# Altium PCB Antenna_21x18_RevA.PcbDoc
Units mil, origin at the board's own origin, x right, y up, seen from the top; angles counter-clockwise.
Board outline 21000 x 18000 mil, 2 copper layers (Top Layer, Bottom Layer), stack 12.8 mil thick; 5 components, 5 nets, 58 pads, 54 vias.
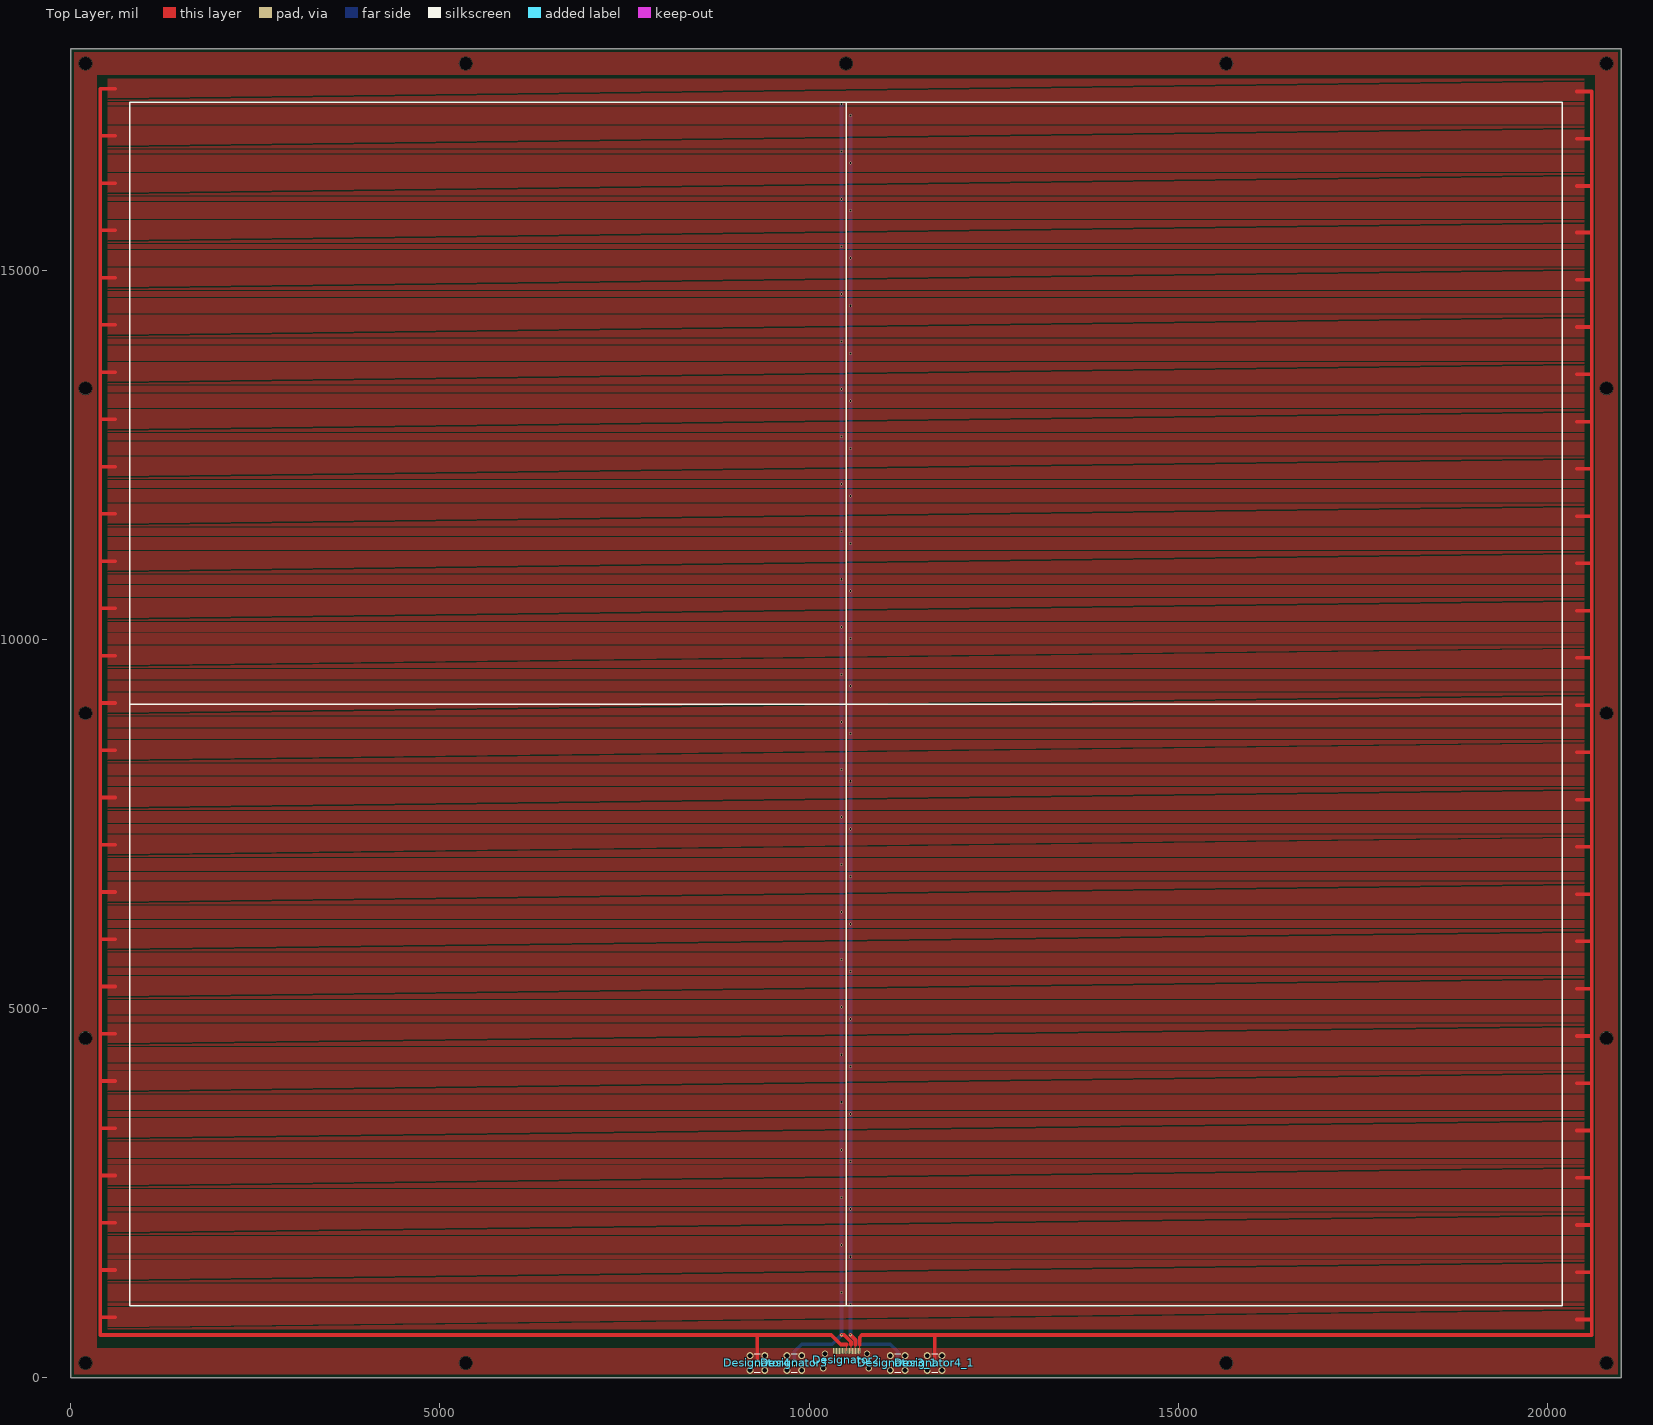
[diagram p0: Top Layer view]
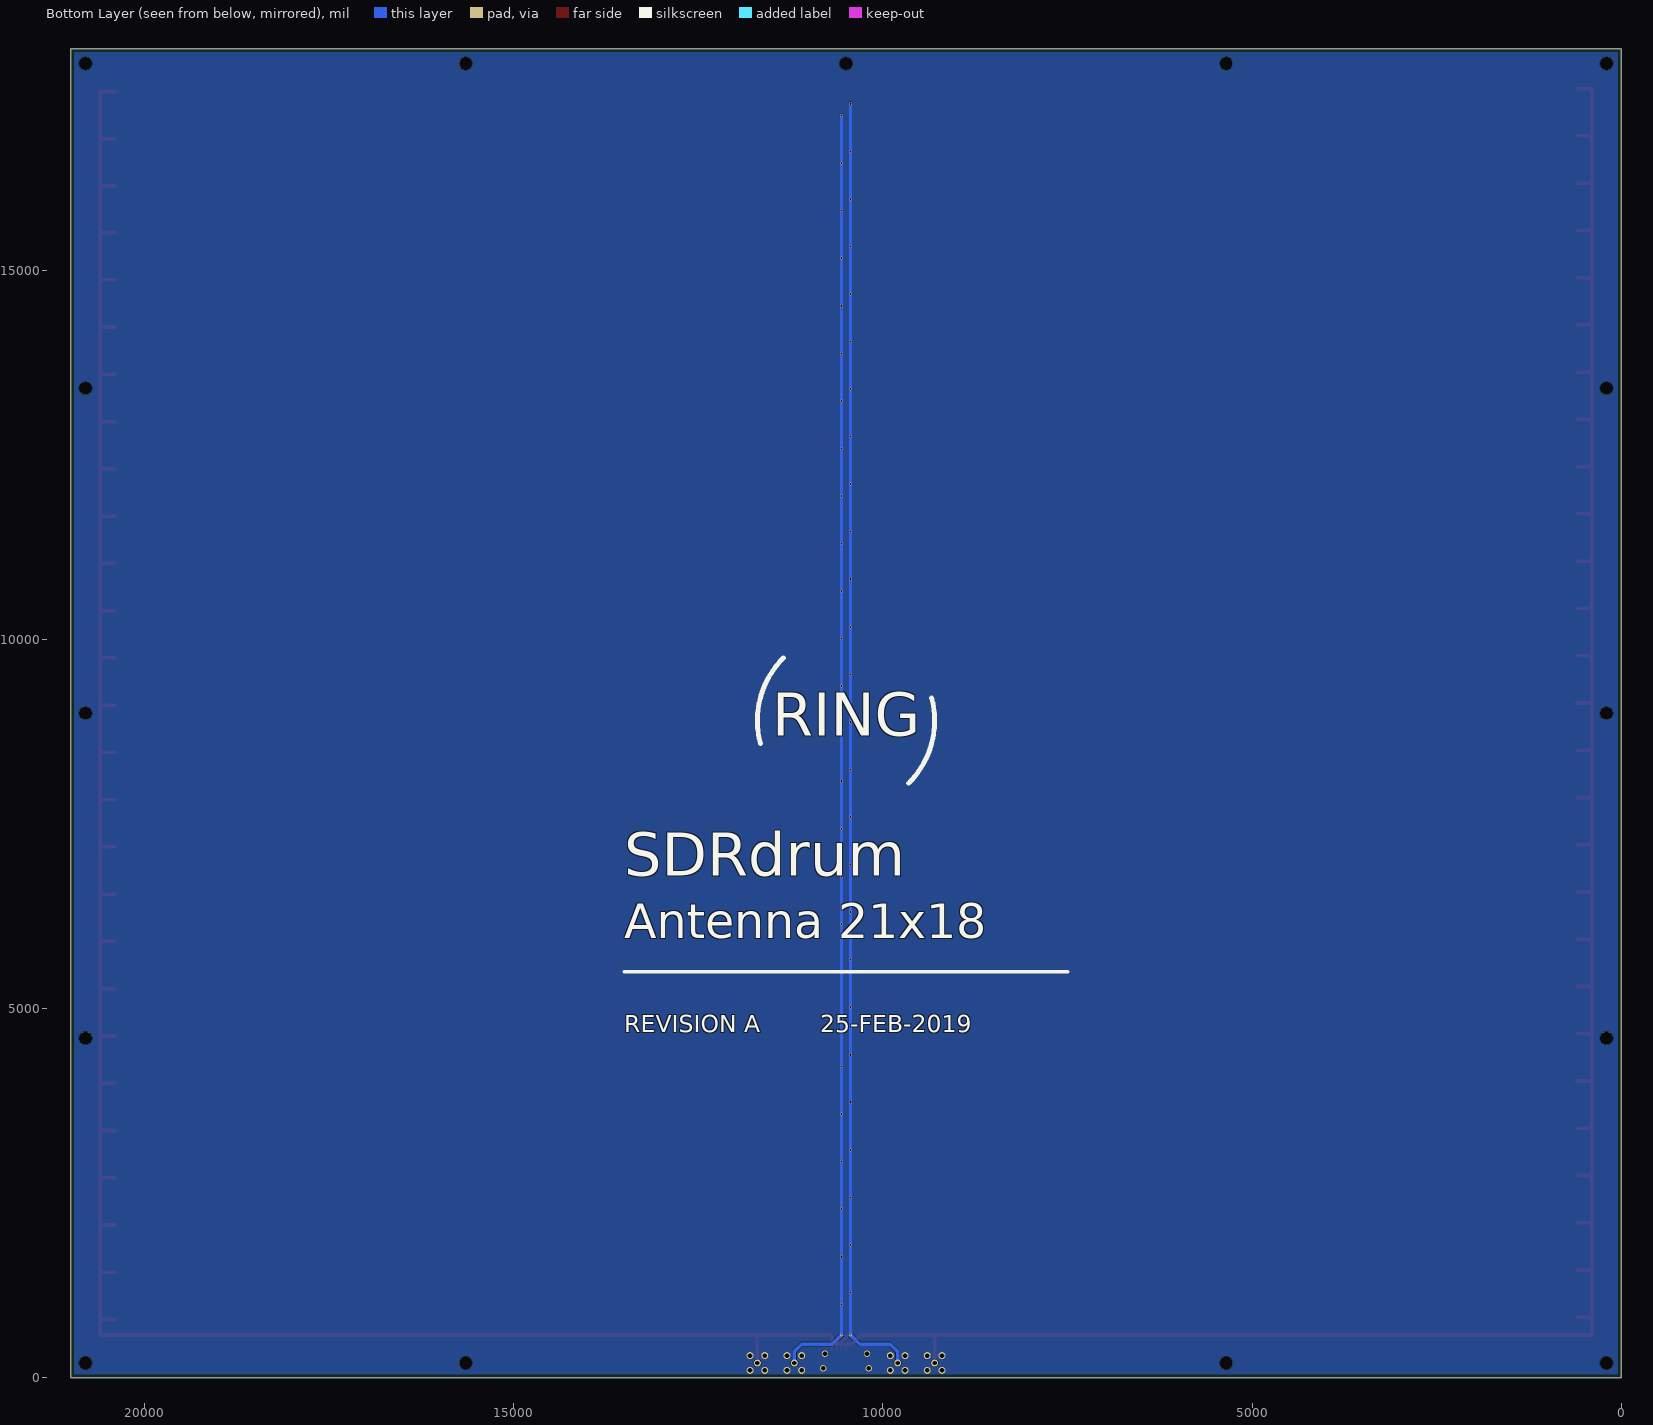
[diagram p1: Bottom Layer view, seen from below]
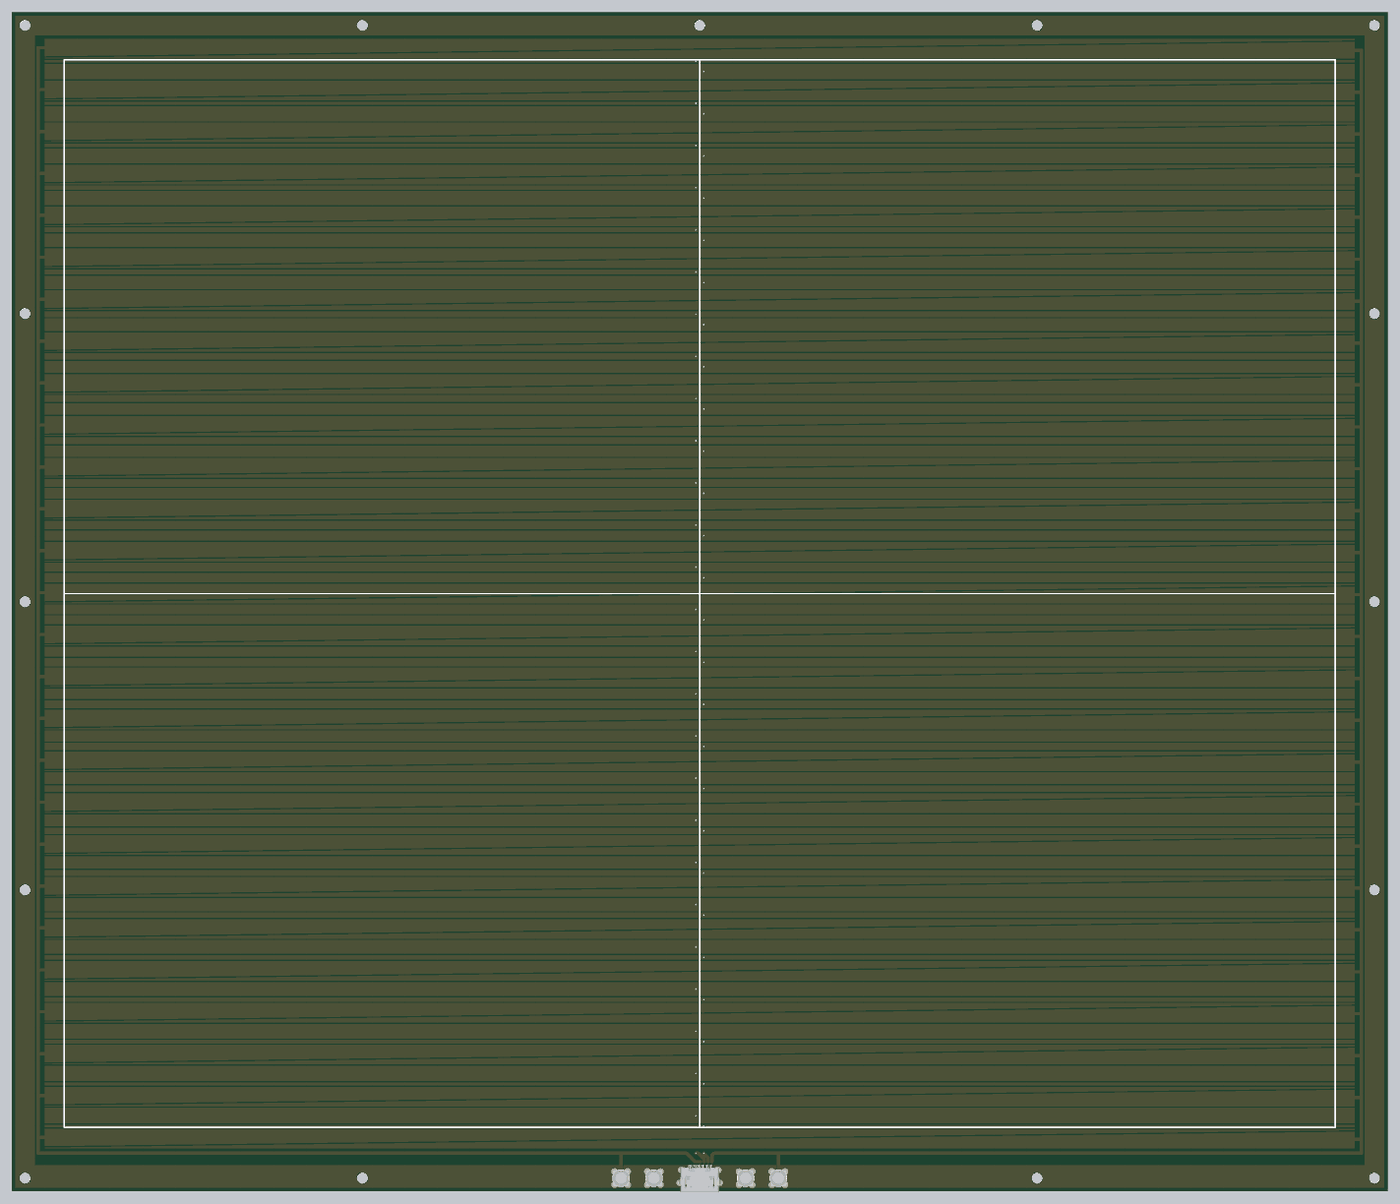
[diagram p2: 3D render of the assembled board from above, using the file's embedded part models]

## Layer stack, top to bottom
Top Solder 1: solder mask 0.4, Solder Resist, Dk 3.5
Top Layer: signal copper 1.4
Dielectric 1: core 10, FR-4, Dk 4.2
Bottom Layer: signal copper 1.4
Bottom Solder 1: solder mask 0.4, Solder Resist, Dk 3.5

## Board outline
0,0 21000,0 21000,18000 0,18000

## Design rules (kind name [scope] priority, off if disabled: settings)
Clearance [All] p1: gap=6 ignorepadtopadclearanceinfootprint=FALSE
HoleSize [All] p1: absolutevalues=TRUE maxlimit=200 minlimit=1 maxpercent=80.000 minpercent=20.000
PlaneConnect [All] p1: planeconnectstyle=Direct reliefexpansion=20 reliefentries=4 reliefconductorwidth=10 reliefairgap=10
PolygonConnect [All] p1: connectstyle=Direct reliefconductorwidth=10 reliefentries=4 polygonreliefangle="90 Angle" airgapwidth=10
RoutingVias [All] p1: holewidth=28 width=50 viastyle="Through Hole" minholewidth=28 minwidth=40 maxholewidth=28 maxwidth=50
SolderMaskExpansion [All] p1: expansion=4
Width [All] p1: maxlimit=100 minlimit=10 preferedwidth=10
28 further rules are at their usual default settings.

## Components (designator, comment, footprint, x,y, rotation, side; value= is the part's Value field where it differs from the comment)
Designator2 "Comment" 10029449-111RLF 10500,325 r0 top
Designator3 "Comment" 5-1814832-1 9800,200 r0 top
Designator3_1 "Comment" 5-1814832-1 11200,200 r180 top
Designator4 "Comment" 5-1814832-1 9300,200 r0 top
Designator4_1 "Comment" 5-1814832-1 11700,200 r180 top

## Footprints (in the part's own frame and the unit in brackets; to place one, negate y for a bottom-side part, rotate by r counter-clockwise, add the part's x,y. Pads: shape width x height; smd on the part's side, far side on the other; paste and mask are expansions set on the pad)
5-1814832-1 [mm]
  round 2.4 hole 1.5: 1(0,0)
  round 2.4 hole 1.6: MH(-2.54,-2.54) MH(-2.54,2.54) MH(2.54,-2.54) MH(2.54,2.54)
  silkscreen extent -3.2,-3.2 3.2,3.2, body extent -3.2,-3.2 3.2,3.2, height 9.5
10029449-111RLF [mm]
  oval 0.3x2 smd: 1(4.75,1) 2(4.25,1) 3(3.75,1) 4(3.25,1) 5(2.75,1) 6(2.25,1) 7(1.75,1) 8(1.25,1) 9(0.75,1) 10(0.25,1) 11(-0.25,1) 12(-0.75,1) 13(-1.25,1) 14(-1.75,1) 15(-2.25,1) 16(-2.75,1) 17(-3.25,1) 18(-3.75,1) 19(-4.25,1)
  round 2.2 hole 1.6: MH1(7.25,0) MH2(7.85,-5) MH3(-7.25,0) MH4(-7.85,-5)
  silkscreen extent -7.5,-3.5 7.5,-1.5, body extent -8.1,-8.45 8.1,1.65, height 6.28

## Free pads (board coordinates)
  round 170 hole 170 unplated: 2(200,200) 2(200,4600) 2(200,9000) 2(200,13400) 2(200,17800) 2(5350,200) 2(5350,17800) 2(10500,17800) 2(15650,200) 2(15650,17800) 2(20800,200) 2(20800,4600) 2(20800,9000) 2(20800,13400) 2(20800,17800)

## Via types
v1: diameter 40, hole 28, Top Layer to Bottom Layer, tented both sides, 52 vias
v2: diameter 40, hole 20, Top Layer to Bottom Layer, tented both sides, 2 vias

## Nets (pads, with @x,y where several pads share a name; then routed paths per layer and width w, separated by ;. In a path a pad name is that pad's centre, name@x,y a point inside that pad or via, vN(x,y) a via of type N, cw(c..) or ccw(c..) an arc to the next point about the centre after c; other vN are vias at no path point)
BL: Designator2.7 Designator3.1 | length 17853.4
  Top Layer w10: Designator2.7 10568.9,450
  Top Layer w50: v2(10440,580) 10476.13,580 10568.9,487.23 10568.9,450
  Bottom Layer w50: Designator3.1 9800,355 9900,455 10315,455 v2(10440,580) v1(10440,1155) v1(10440,1799) v1(10440,3731) v1(10440,4375) v1(10440,6307) v1(10440,6951) v1(10440,7595) v1(10440,8883) v1(10440,9527) v1(10440,11459) v1(10440,12103) v1(10440,14035) v1(10440,14679) v1(10440,15323) v1(10440,15967) v1(10440,16611) v1(10440,17255)
  other v1: 10440,2443 10440,3087 10440,5019 10440,5663 10440,8239 10440,10171 10440,10815 10440,12747 10440,13391
BR: Designator2.4 Designator3_1.1 | length 17647
  Top Layer w10: Designator2.4 10627.95,450
  Top Layer w50: v2(10560,580) 10627.95,512.05 10627.95,450
  Bottom Layer w50: v1(10560,17095) v1(10560,16451) v1(10560,15807) v1(10560,14519) v1(10560,13875) v1(10560,11943) v1(10560,11299) v1(10560,9367) v1(10560,8723) v1(10560,6791) v1(10560,6147) v1(10560,5503) v1(10560,4215) v1(10560,3571) v1(10560,2283) v1(10560,1639) v1(10560,995) v2(10560,580) 10685,455 11100,455 11200,355 Designator3_1.1
  other v1: 10560,2927 10560,4859 10560,7435 10560,8079 10560,10011 10560,10655 10560,12587 10560,13231 10560,15163
GND: Designator2.2 Designator2.5 Designator2.8 Designator2.11 Designator2.MH1 Designator2.MH2 Designator2.MH3 Designator2.MH4 Designator3.MH Designator3_1.MH Designator4.MH Designator4_1.MH
TL: Designator2.10 Designator4.1 | length 32909.3
  Top Layer w10: Designator2.10 10509.84,450
  Top Layer w50: 600,820 400,820 ; 600,1460 400,1460 ; 600,2100 400,2100 ; 600,2740 400,2740 ; 600,3380 400,3380 ; 600,4020 400,4020 ; 600,4660 400,4660 ; 600,5300 400,5300 ; 600,5940 400,5940 ; 600,6580 400,6580 ; 600,7220 400,7220 ; 600,7860 400,7860 ; 600,8500 400,8500 ; 600,9140 400,9140 ; 600,9780 400,9780 ; 600,10420 400,10420 ; 600,11060 400,11060 ; 600,11700 400,11700 ; 600,12340 400,12340 ; 600,12980 400,12980 ; 600,13620 400,13620 ; 600,14260 400,14260 ; 600,14900 400,14900 ; 600,15540 400,15540 ; 600,16180 400,16180 ; 600,16820 400,16820 ; 600,17460 400,17460 400,16820 ; Designator4.1 9300,580 ; 10509.84,450 10430,450 10300,580 9300,580 ; 400,820 400,580 9300,580 ; 400,820 400,1460 ; 400,1460 400,2100 ; 400,2100 400,2740 ; 400,2740 400,3380 ; 400,3380 400,4020 ; 400,4020 400,4660 ; 400,4660 400,5300 ; 400,5300 400,5940 ; 400,5940 400,6580 ; 400,6580 400,7220 ; 400,7220 400,7860 ; 400,7860 400,8500 ; 400,8500 400,9140 ; 400,9140 400,9780 ; 400,9780 400,10420 ; 400,10420 400,11060 ; 400,11060 400,11700 ; 400,11700 400,12340 ; 400,12340 400,12980 ; 400,12980 400,13620 ; 400,13620 400,14260 ; 400,14260 400,14900 ; 400,14900 400,15540 ; 400,15540 400,16180 ; 400,16180 400,16820
TR: Designator2.1 Designator4_1.1 | length 32731
  Top Layer w10: Designator2.1 10687.01,450
  Top Layer w50: 10687.01,450 10687.01,550 10717.01,580 11700,580 ; Designator4_1.1 11700,580 ; 20400,790 20600,790 ; 20400,1430 20600,1430 ; 20400,2070 20600,2070 ; 20400,2710 20600,2710 ; 20400,3350 20600,3350 ; 20400,3990 20600,3990 ; 20400,4630 20600,4630 ; 20400,5270 20600,5270 ; 20400,5910 20600,5910 ; 20400,6550 20600,6550 ; 20400,7190 20600,7190 ; 20400,7830 20600,7830 ; 20400,8470 20600,8470 ; 20400,9110 20600,9110 ; 20400,9750 20600,9750 ; 20400,10390 20600,10390 ; 20400,11030 20600,11030 ; 20400,11670 20600,11670 ; 20400,12310 20600,12310 ; 20400,12950 20600,12950 ; 20400,13590 20600,13590 ; 20400,14230 20600,14230 ; 20400,14870 20600,14870 ; 20400,15510 20600,15510 ; 20400,16140 20600,16140 ; 20400,16780 20600,16780 ; 20400,17420 20600,17420 20600,16780 ; 11700,580 20600,580 20600,790 ; 20600,790 20600,1430 ; 20600,1430 20600,2070 ; 20600,2070 20600,2710 ; 20600,2710 20600,3350 ; 20600,3350 20600,3990 ; 20600,3990 20600,4630 ; 20600,4630 20600,5270 ; 20600,5270 20600,5910 ; 20600,5910 20600,6550 ; 20600,6550 20600,7190 ; 20600,7190 20600,7830 ; 20600,7830 20600,8470 ; 20600,8470 20600,9110 ; 20600,9110 20600,9750 ; 20600,9750 20600,10390 ; 20600,10390 20600,11030 ; 20600,11030 20600,11670 ; 20600,11670 20600,12310 ; 20600,12310 20600,12950 ; 20600,12950 20600,13590 ; 20600,13590 20600,14230 ; 20600,14230 20600,14870 ; 20600,14870 20600,15510 ; 20600,15510 20600,16140 ; 20600,16140 20600,16780
pads on no net: Designator2.3 Designator2.6 Designator2.9 Designator2.12 Designator2.13 Designator2.14 Designator2.15 Designator2.16 Designator2.17 Designator2.18 Designator2.19

## Polygon pours and split planes (outlines as drawn)
GND on Top Layer "GND_L01_P310" (solid, pour order 310): 20650,17950 20650,350 20950,350 20950,17950
GND on Top Layer "GND_L01_P308" (solid, pour order 308): 50,17950 50,350 350,350 350,17950
GND on Top Layer "GND_L01_P306" (solid, pour order 306): 50,17650 20950,17650 20950,17950 50,17950
GND on Top Layer "GND_L01_P304" (solid, pour order 304): 50,50 20950,50 20950,400 50,400
TL on Top Layer "Top Layer-TL 22" (solid, pour order 300): 500,15035 500,14767.43 20500,15010.42 20500,15035
TL on Top Layer "Top Layer-TL 20" (solid, pour order 298): 500,16315 500,16047.43 20500,16290.42 20500,16315
TL on Top Layer "Top Layer-TL 19" (solid, pour order 296): 500,15675 500,15407.43 20500,15650.42 20500,15675
TL on Top Layer "Top Layer-TL 18" (solid, pour order 294): 500,17595 500,17327.43 20500,17570.42 20500,17595
TL on Top Layer "Top Layer-TL 17" (solid, pour order 292): 500,16955 500,16687.43 20500,16930.42 20500,16955
TL on Top Layer "Top Layer-TL 22" (solid, pour order 290): 500,11835 500,11567.43 20500,11810.42 20500,11835
TL on Top Layer "Top Layer-TL 20" (solid, pour order 288): 500,13115 500,12847.43 20500,13090.42 20500,13115
TL on Top Layer "Top Layer-TL 19" (solid, pour order 286): 500,12475 500,12207.43 20500,12450.42 20500,12475
TL on Top Layer "Top Layer-TL 18" (solid, pour order 284): 500,14395 500,14127.43 20500,14370.42 20500,14395
TL on Top Layer "Top Layer-TL 17" (solid, pour order 282): 500,13755 500,13487.43 20500,13730.42 20500,13755
TL on Top Layer "Top Layer-TL 22" (solid, pour order 280): 500,8635 500,8367.43 20500,8610.42 20500,8635
TL on Top Layer "Top Layer-TL 20" (solid, pour order 278): 500,9915 500,9647.43 20500,9890.42 20500,9915
TL on Top Layer "Top Layer-TL 19" (solid, pour order 276): 500,9275 500,9007.43 20500,9250.42 20500,9275
TL on Top Layer "Top Layer-TL 18" (solid, pour order 274): 500,11195 500,10927.43 20500,11170.42 20500,11195
TL on Top Layer "Top Layer-TL 17" (solid, pour order 272): 500,10555 500,10287.43 20500,10530.42 20500,10555
TL on Top Layer "Top Layer-TL 22" (solid, pour order 270): 500,5435 500,5167.43 20500,5410.42 20500,5435
TL on Top Layer "Top Layer-TL 20" (solid, pour order 268): 500,6715 500,6447.43 20500,6690.42 20500,6715
TL on Top Layer "Top Layer-TL 19" (solid, pour order 266): 500,6075 500,5807.43 20500,6050.42 20500,6075
TL on Top Layer "Top Layer-TL 18" (solid, pour order 264): 500,7995 500,7727.43 20500,7970.42 20500,7995
TL on Top Layer "Top Layer-TL 17" (solid, pour order 262): 500,7355 500,7087.43 20500,7330.42 20500,7355
BR on Top Layer "Top Layer-BR 10" (solid, pour order 258): 500,16975 20500,16975 20500,17215 500,17215
BL on Top Layer "Top Layer-BL 17" (solid, pour order 256): 500,17275 500,17235 20500,17235 20500,17275
TR on Top Layer "Top Layer-TR 1" (solid, pour order 252): 20500,17295 20500,17550.42 500,17307.43 500,17295
BR on Top Layer "Top Layer-BR 10" (solid, pour order 250): 500,16335 20500,16335 20500,16567 500,16567
BL on Top Layer "Top Layer-BL 17" (solid, pour order 248): 500,16635 500,16587 20500,16587 20500,16635
TR on Top Layer "Top Layer-TR 1" (solid, pour order 244): 20500,16655 20500,16910.42 500,16667.43 500,16655
TR on Top Layer "Top Layer-TR 1" (solid, pour order 242): 20500,16015 20500,16270.42 500,16027.43 500,16015
BL on Top Layer "Top Layer-BL 17" (solid, pour order 238): 500,15995 500,15939 20500,15939 20500,15995
BR on Top Layer "Top Layer-BR 10" (solid, pour order 236): 500,15695 20500,15695 20500,15919 500,15919
TR on Top Layer "Top Layer-TR 1" (solid, pour order 232): 20500,15375 20500,15630.42 500,15387.43 500,15375
TR on Top Layer "Top Layer-TR" (solid, pour order 92): 20500,1295 20500,1550.42 500,1307.43 500,1295
no net on Top Layer "Top Layer-No Net" (solid, pour order 6): 300,15030
TR on Top Layer "Top Layer-TR 1" (solid, pour order 10): 20500,14735 20500,14990.42 500,14747.43 500,14735
TR on Top Layer "Top Layer-TR 2" (solid, pour order 16): 20500,13455 20500,13710.42 500,13467.43 500,13455
TR on Top Layer "Top Layer-TR 3" (solid, pour order 12): 20500,14095 20500,14350.42 500,14107.43 500,14095
TR on Top Layer "Top Layer-TR 4" (solid, pour order 24): 20500,12175 20500,12430.42 500,12187.43 500,12175
TR on Top Layer "Top Layer-TR 5" (solid, pour order 20): 20500,12815 20500,13070.42 500,12827.43 500,12815
TR on Top Layer "Top Layer-TR 6" (solid, pour order 32): 20500,10895 20500,11150.42 500,10907.43 500,10895
TR on Top Layer "Top Layer-TR 7" (solid, pour order 28): 20500,11535 20500,11790.42 500,11547.43 500,11535
TR on Top Layer "Top Layer-TR 8" (solid, pour order 40): 20500,9615 20500,9870.42 500,9627.43 500,9615
TR on Top Layer "Top Layer-TR 9" (solid, pour order 36): 20500,10255 20500,10510.42 500,10267.43 500,10255
TR on Top Layer "Top Layer-TR 10" (solid, pour order 48): 20500,8335 20500,8590.42 500,8347.43 500,8335
TR on Top Layer "Top Layer-TR 11" (solid, pour order 44): 20500,8975 20500,9230.42 500,8987.43 500,8975
TR on Top Layer "Top Layer-TR 12" (solid, pour order 56): 20500,7055 20500,7310.42 500,7067.43 500,7055
TR on Top Layer "Top Layer-TR 13" (solid, pour order 52): 20500,7695 20500,7950.42 500,7707.43 500,7695
TR on Top Layer "Top Layer-TR 14" (solid, pour order 64): 20500,5775 20500,6030.42 500,5787.43 500,5775
TR on Top Layer "Top Layer-TR 15" (solid, pour order 60): 20500,6415 20500,6670.42 500,6427.43 500,6415
TL on Top Layer "Top Layer-TL 15" (solid, pour order 74): 500,4795 500,4527.43 20500,4770.42 20500,4795
TR on Top Layer "Top Layer-TR 16" (solid, pour order 72): 20500,4495 20500,4750.42 500,4507.43 500,4495
TR on Top Layer "Top Layer-TR 17" (solid, pour order 68): 20500,5135 20500,5390.42 500,5147.43 500,5135
TL on Top Layer "Top Layer-TL 17" (solid, pour order 82): 500,3515 500,3247.43 20500,3490.42 20500,3515
TR on Top Layer "Top Layer-TR 18" (solid, pour order 80): 20500,3215 20500,3470.42 500,3227.43 500,3215
TL on Top Layer "Top Layer-TL 18" (solid, pour order 78): 500,4155 500,3887.43 20500,4130.42 20500,4155
TR on Top Layer "Top Layer-TR 19" (solid, pour order 76): 20500,3855 20500,4110.42 500,3867.43 500,3855
TL on Top Layer "Top Layer-TL 19" (solid, pour order 90): 500,2235 500,1967.43 20500,2210.42 20500,2235
TR on Top Layer "Top Layer-TR 20" (solid, pour order 88): 20500,1935 20500,2190.42 500,1947.43 500,1935
TL on Top Layer "Top Layer-TL 20" (solid, pour order 86): 500,2875 500,2607.43 20500,2850.42 20500,2875
TR on Top Layer "Top Layer-TR 21" (solid, pour order 84): 20500,2575 20500,2830.42 500,2587.43 500,2575
TL on Top Layer "Top Layer-TL 21" (solid, pour order 98): 500,955 500,687.43 20500,930.42 20500,955
TR on Top Layer "Top Layer-TR 22" (solid, pour order 96): 20500,655 20500,910.42 500,667.43 500,655
TL on Top Layer "Top Layer-TL 22" (solid, pour order 94): 500,1595 500,1327.43 20500,1570.42 20500,1595
BL on Top Layer "Top Layer-BL" (solid, pour order 112): 500,14715 500,14643 20500,14643 20500,14715
BL on Top Layer "Top Layer-BL 1" (solid, pour order 214): 500,4475 20500,4475 20500,4275 500,4275
BL on Top Layer "Top Layer-BL 2" (solid, pour order 206): 500,5755 20500,5755 20500,5571 500,5571
BL on Top Layer "Top Layer-BL 3" (solid, pour order 228): 500,1915 20500,1915 20500,1683 500,1683
BL on Top Layer "Top Layer-BL 4" (solid, pour order 222): 500,3195 20500,3195 20500,2979 500,2979
BR on Top Layer "Top Layer-BR" (solid, pour order 4): 500,15271 500,15055 20500,15055 20500,15271
BR on Top Layer "Top Layer-BR 1" (solid, pour order 116): 500,13775 20500,13775 20500,13975 500,13975
BR on Top Layer "Top Layer-BR 2" (solid, pour order 114): 500,14415 20500,14415 20500,14623 500,14623
BR on Top Layer "Top Layer-BR 3" (solid, pour order 120): 500,13135 20500,13135 20500,13327 500,13327
BR on Top Layer "Top Layer-BR 4" (solid, pour order 124): 500,12495 20500,12495 20500,12679 500,12679
BR on Top Layer "Top Layer-BR 5" (solid, pour order 128): 500,11855 20500,11855 20500,12031 500,12031
BR on Top Layer "Top Layer-BR 6" (solid, pour order 132): 500,11215 20500,11215 20500,11383 500,11383
BR on Top Layer "Top Layer-BR 7" (solid, pour order 136): 500,10575 20500,10575 20500,10735 500,10735
BR on Top Layer "Top Layer-BR 8" (solid, pour order 140): 500,9935 20500,9935 20500,10087 500,10087
BR on Top Layer "Top Layer-BR 9" (solid, pour order 144): 500,9295 20500,9295 20500,9439 500,9439
BR on Top Layer "Top Layer-BR 10" (solid, pour order 148): 500,8655 20500,8655 20500,8791 500,8791
BR on Top Layer "Top Layer-BR 11" (solid, pour order 192): 500,7375 500,7495 20500,7495 20500,7375
BR on Top Layer "Top Layer-BR 12" (solid, pour order 108): 500,8143 500,8015 20500,8015 20500,8143
BL on Top Layer "Top Layer-BL 5" (solid, pour order 210): 500,5115 20500,5115 20500,4923 500,4923
BL on Top Layer "Top Layer-BL 6" (solid, pour order 218): 500,3835 20500,3835 20500,3627 500,3627
BL on Top Layer "Top Layer-BL 7" (solid, pour order 226): 500,2555 20500,2555 20500,2331 500,2331
BL on Top Layer "Top Layer-BL 8" (solid, pour order 102): 500,1275 500,1035 20500,1035 20500,1275
BL on Top Layer "Top Layer-BL 9" (solid, pour order 118): 500,14075 500,13995 20500,13995 20500,14075
BL on Top Layer "Top Layer-BL 10" (solid, pour order 122): 500,13435 500,13347 20500,13347 20500,13435
BL on Top Layer "Top Layer-BL 11" (solid, pour order 126): 500,12795 500,12699 20500,12699 20500,12795
BL on Top Layer "Top Layer-BL 12" (solid, pour order 130): 500,12155 500,12051 20500,12051 20500,12155
BL on Top Layer "Top Layer-BL 13" (solid, pour order 134): 500,11515 500,11403 20500,11403 20500,11515
BL on Top Layer "Top Layer-BL 14" (solid, pour order 138): 500,10875 500,10755 20500,10755 20500,10875
BL on Top Layer "Top Layer-BL 15" (solid, pour order 142): 500,10235 500,10107 20500,10107 20500,10235
BL on Top Layer "Top Layer-BL 16" (solid, pour order 146): 500,9595 500,9459 20500,9459 20500,9595
BL on Top Layer "Top Layer-BL 17" (solid, pour order 150): 500,8955 500,8811 20500,8811 20500,8955
BL on Top Layer "Top Layer-BL 18" (solid, pour order 104): 500,8315 500,8163 20500,8163 20500,8315
BL on Top Layer "Top Layer-BL 19" (solid, pour order 194): 500,7675 20500,7675 20500,7515 500,7515
BL on Top Layer "Top Layer-BL 20" (solid, pour order 198): 500,7035 20500,7035 20500,6867 500,6867
BR on Top Layer "Top Layer-BR 13" (solid, pour order 196): 500,6735 500,6847 20500,6847 20500,6735
BL on Top Layer "Top Layer-BL 21" (solid, pour order 202): 500,6395 20500,6395 20500,6219 500,6219
BR on Top Layer "Top Layer-BR 14" (solid, pour order 200): 500,6095 500,6199 20500,6199 20500,6095
BR on Top Layer "Top Layer-BR 15" (solid, pour order 204): 500,5455 500,5551 20500,5551 20500,5455
BR on Top Layer "Top Layer-BR 16" (solid, pour order 208): 500,4815 500,4903 20500,4903 20500,4815
BR on Top Layer "Top Layer-BR 17" (solid, pour order 212): 500,4175 500,4255 20500,4255 20500,4175
BR on Top Layer "Top Layer-BR 18" (solid, pour order 216): 500,3535 500,3607 20500,3607 20500,3535
BR on Top Layer "Top Layer-BR 19" (solid, pour order 220): 500,2895 500,2959 20500,2959 20500,2895
BR on Top Layer "Top Layer-BR 20" (solid, pour order 224): 500,2255 500,2311 20500,2311 20500,2255
BR on Top Layer "Top Layer-BR 21" (solid, pour order 230): 500,1615 500,1663 20500,1663 20500,1615
BR on Top Layer "Top Layer-BR 22" (solid, pour order 100): 500,975 20500,975 20500,1015 500,1015
BL on Top Layer "Top Layer-BL 22" (solid, pour order 2): 500,15291 20500,15291 20500,15355 500,15355
GND on Bottom Layer "GND_L02_P302" (solid, pour order 302): 50,50 20950,50 20950,17950 50,17950

## Silkscreen, mask and mechanical layers (free items; w line width, h text height)
Top Overlay 1:
  lines w20: 800,9125 20200,9125 ; 10500,975 10500,17275 ; 800,975 20200,975 20200,17275 800,17275 800,975
Bottom Overlay 1:
  lines w50: 7500,5500 13500,5500
  lines w66: 9340.89,9210.58 ccw(c10500,8900) 9651.47,8051.47 ; 11348.53,9748.53 cw(c10500,8900) 11659.11,8589.42
  text "RING" at 11500,8500 h1000
  text "SDRdrum" at 13500,6600 h1000
  text "Antenna 21x18" at 13500,5800 h800
  text "REVISION A        25-FEB-2019" at 13500,4600 h400
Mechanical 1:
  the board outline again, w7.87